# Altium PCB XMini.PcbDoc
Units mm, origin at the board's own origin, x right, y up, seen from the top; angles counter-clockwise.
Board outline 108.25 x 103.15 mm, 2 copper layers (Top Layer, Bottom Layer); 79 components, 103 nets, 273 pads, 164 vias.
Unrouted connection lines stored in the file: 2.
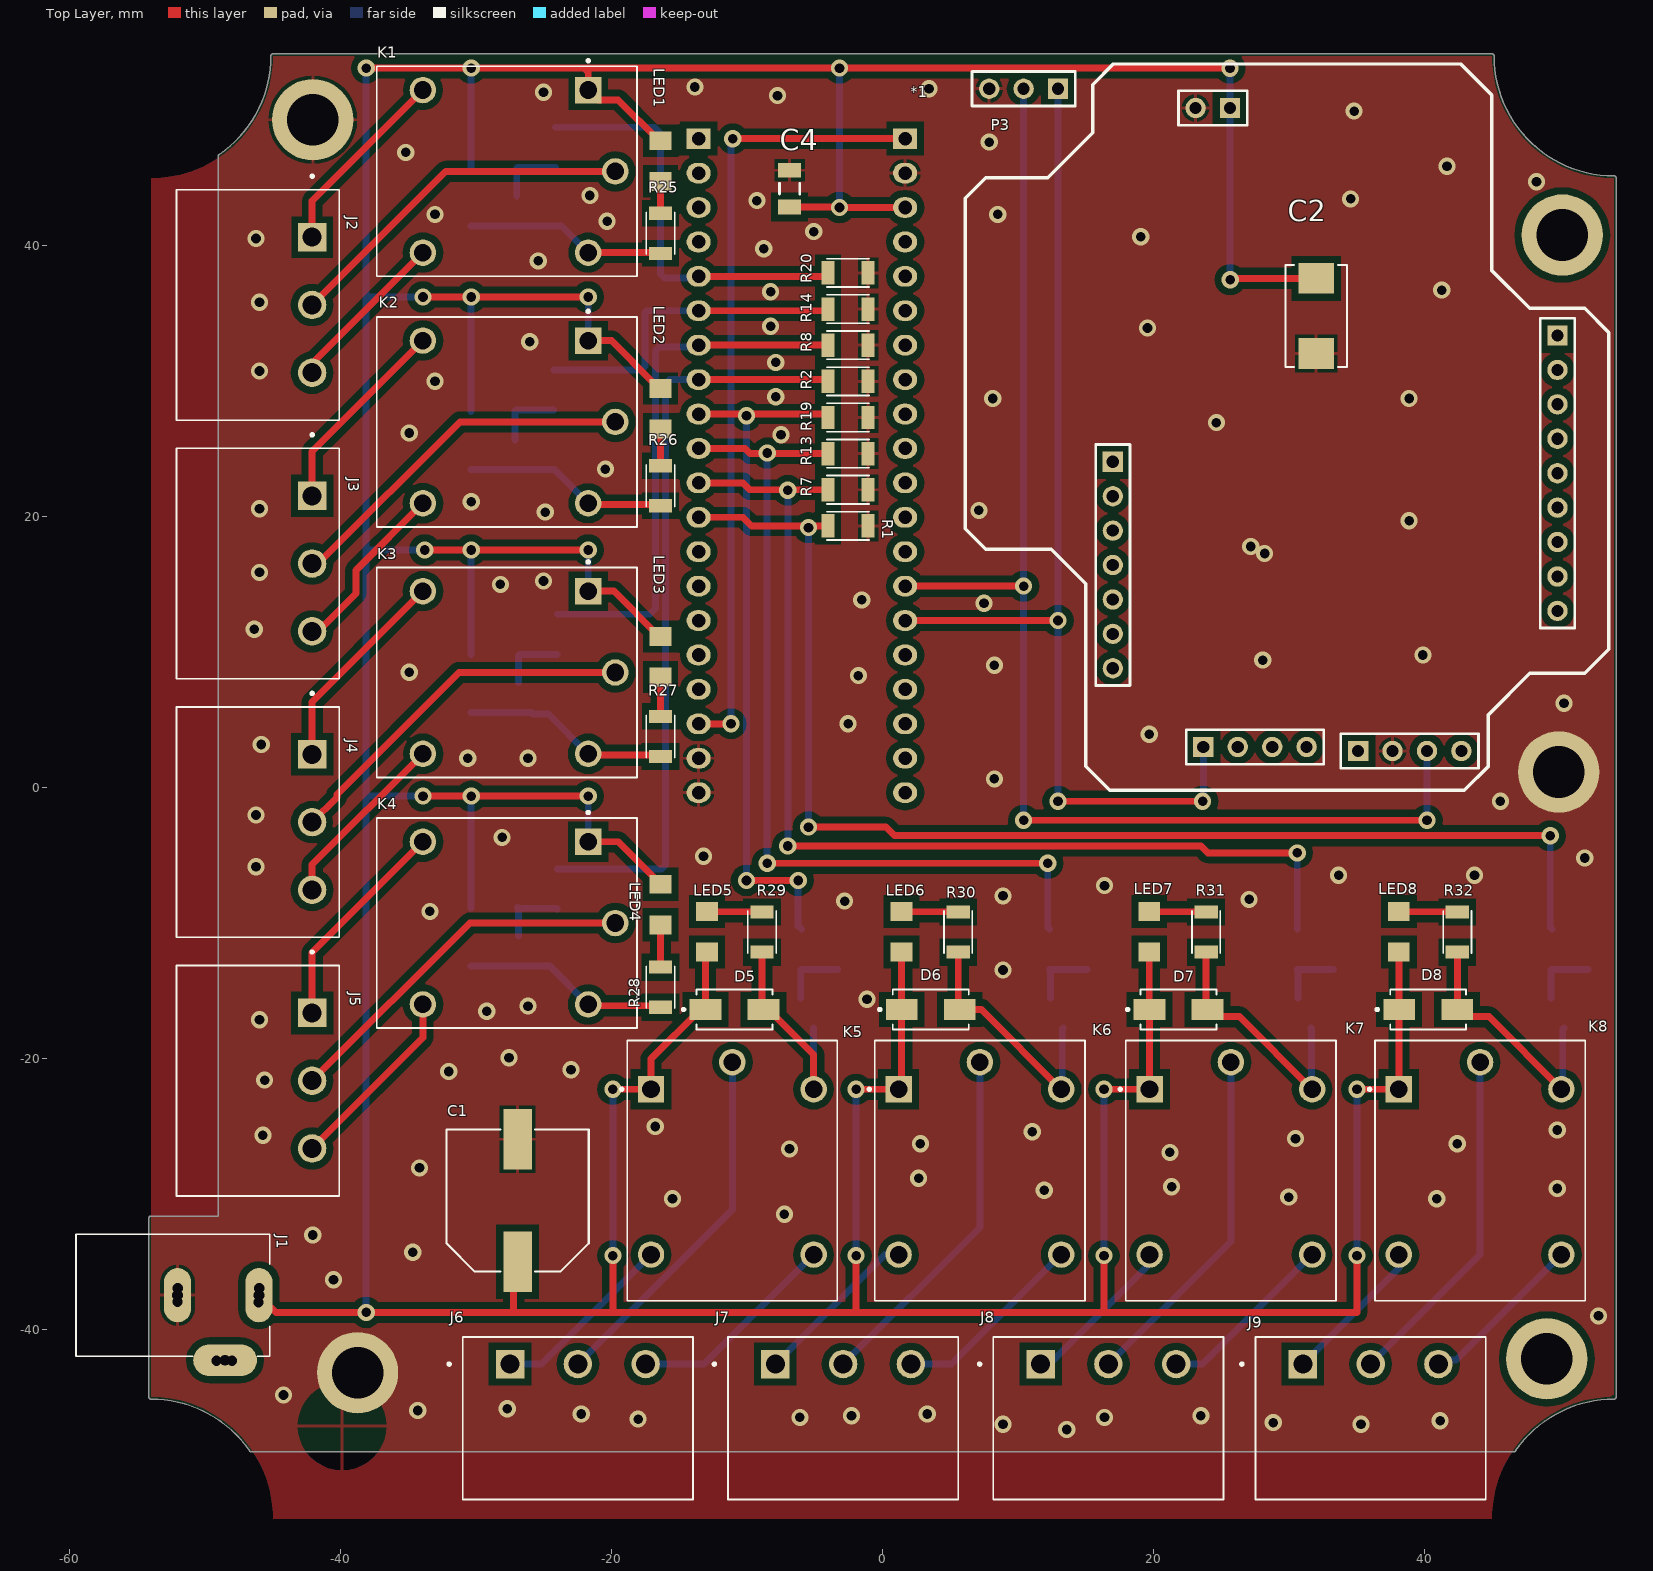
[diagram p0: Top Layer view]
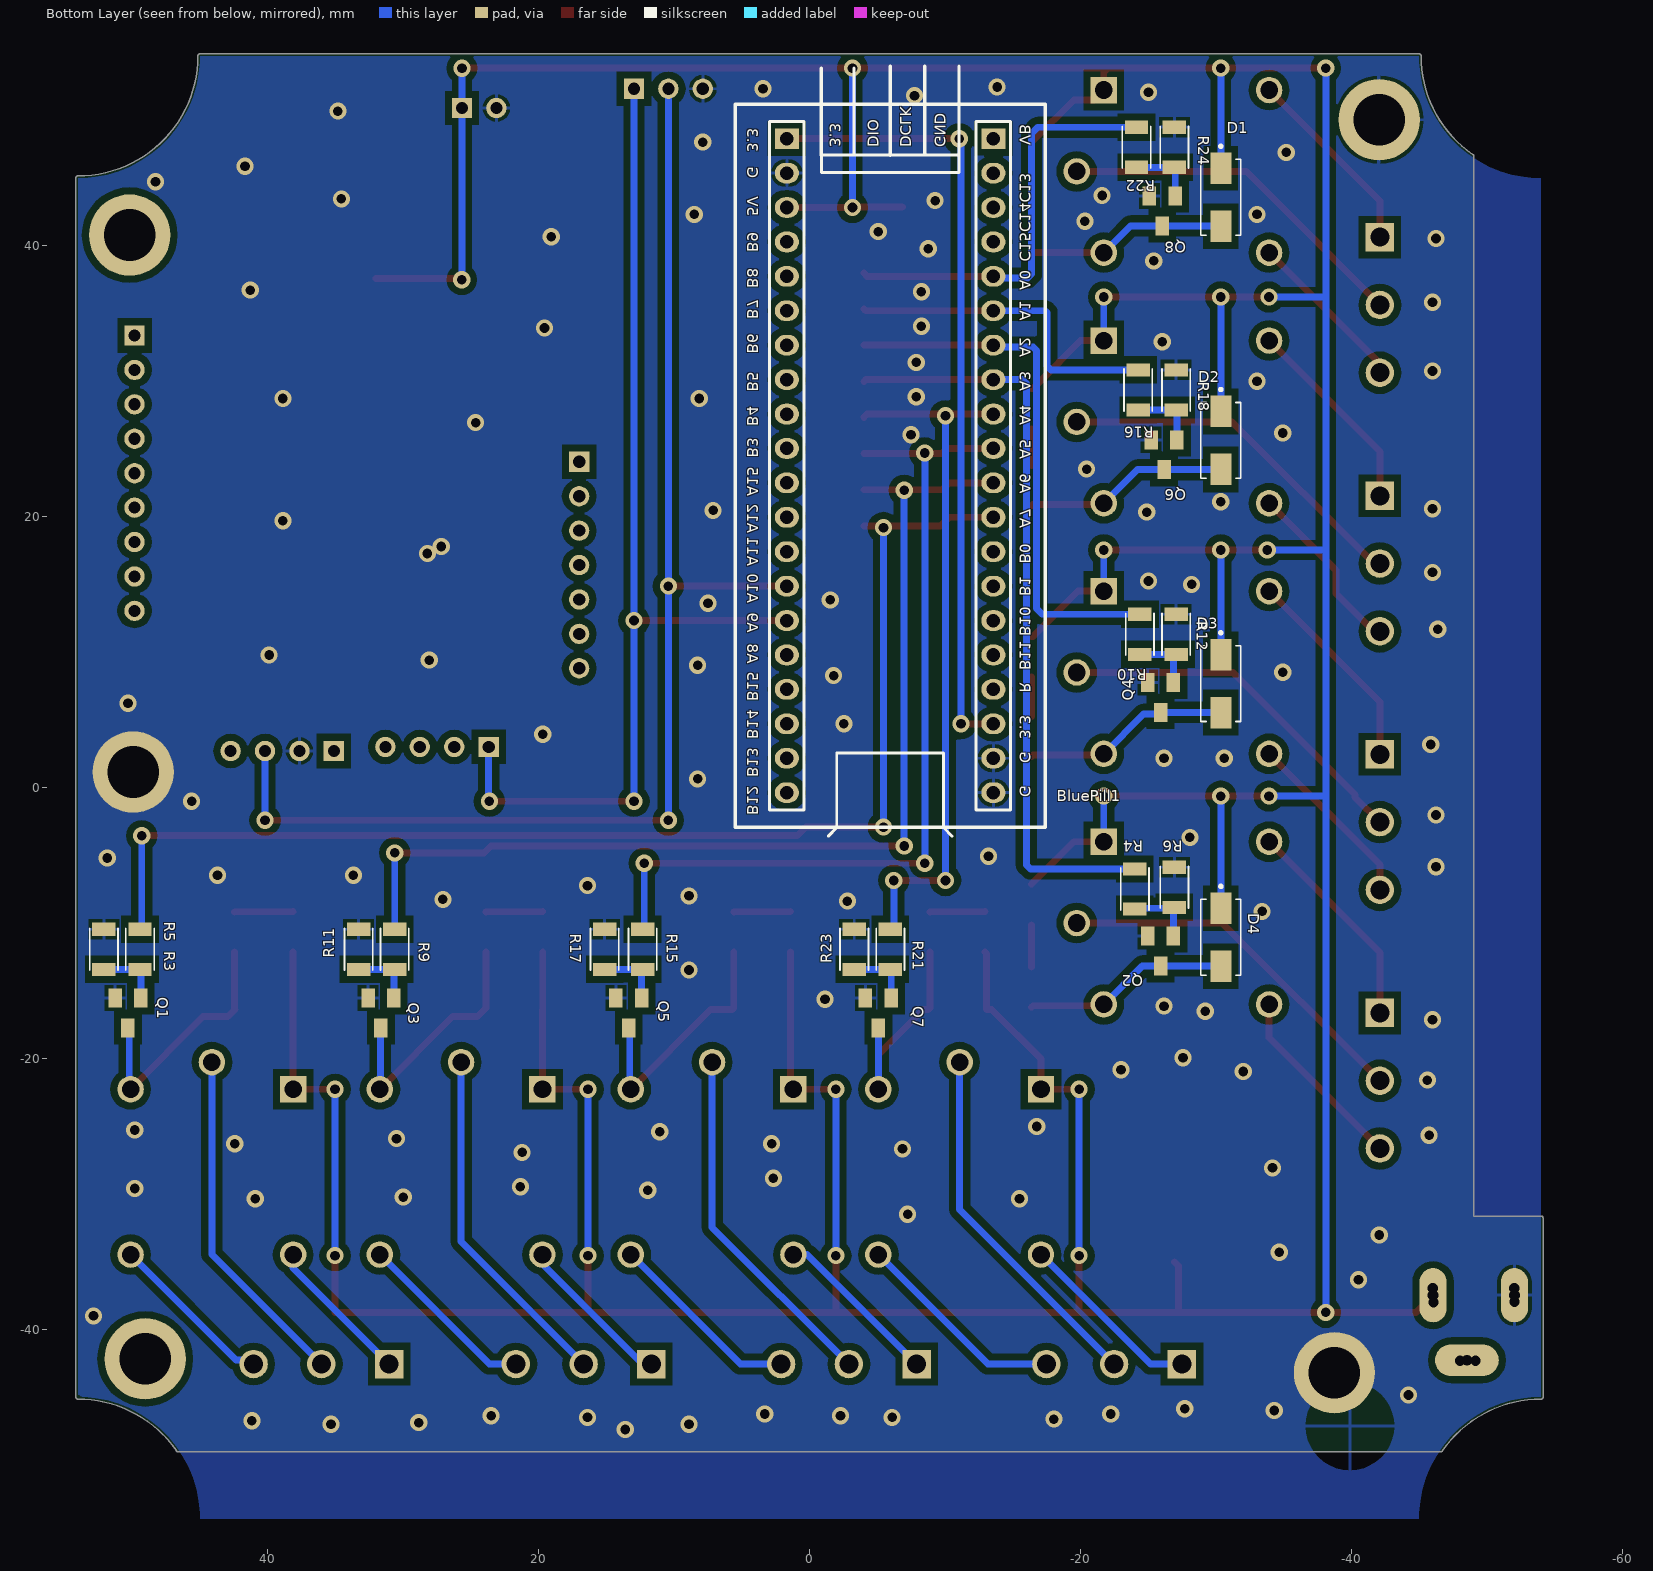
[diagram p1: Bottom Layer view, seen from below]

## Layer stack, top to bottom
Top Solder: solder mask 0.0102, Solder Resist, Dk 3.5
Top Layer: signal copper 0.0356
Dielectric 1: dielectric 0.32, FR-4, Dk 4.8
Bottom Layer: signal copper 0.0356
Bottom Solder: solder mask 0.0102, Solder Resist, Dk 3.5

## Board outline
-53.998,-45.127 cw(c-54,-45) -54.102,-45.076 cw(c-54,-45) -54.127,-44.999 -54.127,-31.75 cw(c-54,-31.75) -53.947,-31.634 cw(c-53.895,-31.75) -53.895,-31.623 -49.022,-31.623 -49.022,46.595 cw(c-48.895,46.595) -48.934,46.716 ccw(c-54,54) -45.127,53.998 cw(c-45,54) -45.076,54.102 cw(c-45,54) -44.999,54.127 44.999,54.127 cw(c45,54) 45.076,54.102 cw(c45,54) 45.127,54 cw(c45,54) 45.127,53.998 ccw(c54,54) 53.998,45.127 ccw(c54,54) 54,45.127 53.998,45.127 cw(c54,45) 54.102,45.076 cw(c54,45) 54.127,45 cw(c54,45) 54.127,44.999 54.127,-45 ccw(c54,-45) 54.127,-44.999 54.127,-45 cw(c54,-45) 54.102,-45.076 cw(c54,-45) 53.998,-45.127 cw(c54,-54) 54,-45.127 53.998,-45.127 ccw(c54,-54) 46.736,-48.905 cw(c46.609,-48.895) 46.609,-49.022 46.588,-49.022 -46.549,-49.022 cw(c-46.584,-48.9) -46.689,-48.972 ccw(c-54,-54)

## Design rules (kind name [scope] priority, off if disabled: settings)
Clearance [All] p1: gap=0.254 ignorepadtopadclearanceinfootprint=FALSE except(0: Arc-Hole Track-Hole SMDPad-Hole THPad-Hole Via-Hole Fill-Hole Poly-Hole Region-Hole Text-Hole; 0.508: Arc-Poly Track-Poly SMDPad-Poly THPad-Poly Via-Poly Fill-Poly Poly-Poly)
PolygonConnect [All] p1: connectstyle=Relief reliefconductorwidth=0.254 reliefentries=4 polygonreliefangle="90 Angle" airgapwidth=0.254
RoutingVias [All] p1: holewidth=0.711 width=1.27 viastyle="Through Hole" minholewidth=0.711 minwidth=1.27 maxholewidth=0.711 maxwidth=1.27
SolderMaskExpansion [All] p1: expansion=0.102
Width [All] p1: maxlimit=0.508 minlimit=0.508 preferedwidth=0.508
30 further rules are at their usual default settings.

## Components (designator, comment, footprint, x,y, rotation, side; value= is the part's Value field where it differs from the comment)
*1 "Component_1" Lora_Board 33.401,26.416 r0 top locked
BluePill1 "BluePill" "stm32 Blue pill" 5.352,-2.794 r180 bottom locked
C1 "1000uF" *CAPAE1030X1050N -26.924,-30.48 r90 top
C2 "100uF" *CAPCP7343X430N 32.004,34.798 r270 top
C4 "Cap Semi" C1206 -6.858,44.196 r270 top value=100nF
D1 "S1M" "SMD Diode*DIOM5227X270NSMD DiodeS1MSMD DiodePrimarySMD Diode" -30.353,43.561 r270 bottom
D2 "S1M" "SMD Diode*DIOM5227X270NSMD DiodeS1MSMD DiodePrimarySMD Diode" -30.353,25.612 r270 bottom
D3 "S1M" "SMD Diode*DIOM5227X270NSMD DiodeS1MSMD DiodePrimarySMD Diode" -30.353,7.662 r270 bottom
D4 "S1M" "SMD Diode*DIOM5227X270NSMD DiodeS1MSMD DiodePrimarySMD Diode" -30.353,-11.049 r270 bottom
D5 "S1M" "SMD Diode*DIOM5227X270NSMD DiodeS1MSMD DiodePrimarySMD Diode" -10.922,-16.383 r0 top
D6 "S1M" "SMD Diode*DIOM5227X270NSMD DiodeS1MSMD DiodePrimarySMD Diode" 3.556,-16.383 r0 top
D7 "S1M" "SMD Diode*DIOM5227X270NSMD DiodeS1MSMD DiodePrimarySMD Diode" 21.844,-16.383 r0 top
D8 "S1M" "SMD Diode*DIOM5227X270NSMD DiodeS1MSMD DiodePrimarySMD Diode" 40.259,-16.383 r0 top
J1 "DC-005" *NINIGI_DC-005 -48.514,-37.465 r0 top
J2 "1757488" *PHOENIX_1757488 -42.089,40.687 r270 top locked
J3 "1757488" *PHOENIX_1757488 -42.089,21.606 r270 top locked
J4 "1757488" *PHOENIX_1757488 -42.089,2.524 r270 top locked
J5 "1757488" *PHOENIX_1757488 -42.089,-16.557 r270 top locked
J6 "1757488" *PHOENIX_1757488 -27.559,-42.545 r0 top locked
J7 "1757488" *PHOENIX_1757488 -7.985,-42.545 r0 top locked
J8 "1757488" *PHOENIX_1757488 11.588,-42.545 r0 top locked
J9 "1757488" *PHOENIX_1757488 30.941,-42.545 r0 top locked
K1 "1-1721150-0" *TE_ORWH-SH-105D1F,000 -21.717,51.466 r180 top locked
K2 "1-1721150-0" *TE_ORWH-SH-105D1F,000 -21.717,32.977 r180 top locked
K3 "1-1721150-0" *TE_ORWH-SH-105D1F,000 -21.717,14.487 r180 top locked
K4 "1-1721150-0" *TE_ORWH-SH-105D1F,000 -21.717,-4.002 r180 top locked
K5 "1-1721150-0" *TE_ORWH-SH-105D1F,000 -17.08,-22.268 r270 top locked
K6 "1-1721150-0" *TE_ORWH-SH-105D1F,000 1.186,-22.268 r270 top locked
K7 "1-1721150-0" *TE_ORWH-SH-105D1F,000 19.707,-22.268 r270 top locked
K8 "1-1721150-0" *TE_ORWH-SH-105D1F,000 38.1,-22.268 r270 top locked
LED1 "Red" *LED_597-3111-407F -16.383,46.228 r90 top
LED2 "Red" *LED_597-3111-407F -16.383,27.94 r90 top
LED3 "Red" *LED_597-3111-407F -16.383,9.652 r90 top
LED4 "Red" *LED_597-3111-407F -16.383,-8.636 r90 top
LED5 "Red" *LED_597-3111-407F -12.954,-10.643 r270 top
LED6 "Red" *LED_597-3111-407F 1.397,-10.643 r270 top
LED7 "Red" *LED_597-3111-407F 19.685,-10.643 r270 top
LED8 "Red" *LED_597-3111-407F 38.1,-10.643 r270 top
P3 "Header 3" HDR1X3 12.954,51.562 r180 top
Q1 "2N7002" *SOT23 50.292,-16.637 r0 bottom
Q2 "2N7002" *SOT23 -25.908,-12.065 r0 bottom
Q3 "2N7002" *SOT23 31.623,-16.637 r0 bottom
Q4 "2N7002" *SOT23 -25.908,6.647 r0 bottom
Q5 "2N7002" *SOT23 13.335,-16.637 r0 bottom
Q6 "2N7002" *SOT23 -26.162,24.554 r0 bottom
Q7 "2N7002" *SOT23 -5.08,-16.637 r0 bottom
Q8 "2N7002" *SOT23 -26.035,42.545 r0 bottom
R1 "10K" *RESC3116X65N -2.54,19.304 r0 top
R2 "10K" *RESC3116X65N -2.54,29.972 r0 top
R3 "100" *RESC3116X65N 49.403,-11.938 r270 bottom
R4 "100" *RESC3116X65N -24.003,-7.493 r270 bottom
R5 "100K" *RESC3116X65N 52.07,-11.938 r90 bottom
R6 "100K" *RESC3116X65N -26.924,-7.366 r90 bottom
R7 "10K" *RESC3116X65N -2.54,21.971 r0 top
R8 "10K" *RESC3116X65N -2.54,32.639 r0 top
R9 "100" *RESC3116X65N 30.607,-11.938 r270 bottom
R10 "100" *RESC3116X65N -24.384,11.303 r270 bottom
R11 "100K" *RESC3116X65N 33.274,-11.938 r90 bottom
R12 "100K" *RESC3116X65N -27.051,11.303 r90 bottom
R13 "10K" *RESC3116X65N -2.54,24.638 r0 top
R14 "10K" *RESC3116X65N -2.54,35.306 r0 top
R15 "100" *RESC3116X65N 12.319,-11.938 r270 bottom
R16 "100" *RESC3116X65N -24.257,29.337 r270 bottom
R17 "100K" *RESC3116X65N 15.113,-11.938 r90 bottom
R18 "100K" *RESC3116X65N -27.051,29.337 r90 bottom
R19 "10K" *RESC3116X65N -2.54,27.305 r0 top
R20 "10K" *RESC3116X65N -2.54,37.973 r0 top
R21 "100" *RESC3116X65N -5.969,-11.938 r270 bottom
R22 "100" *RESC3116X65N -24.13,47.244 r270 bottom
R23 "100K" *RESC3116X65N -3.302,-11.938 r90 bottom
R24 "100K" *RESC3116X65N -26.924,47.244 r90 bottom
R25 "1K" *RESC3116X65N -16.383,40.894 r270 top
R26 "1K" *RESC3116X65N -16.383,22.267 r270 top
R27 "1K" *RESC3116X65N -16.383,3.768 r270 top
R28 "1K" *RESC3116X65N -16.383,-14.732 r270 top
R29 "1K" *RESC3116X65N -8.89,-10.668 r270 top
R30 "1K" *RESC3116X65N 5.588,-10.668 r270 top
R31 "1K" *RESC3116X65N 23.876,-10.668 r270 top
R32 "1K" *RESC3116X65N 42.418,-10.668 r270 top

## Footprints (in the part's own frame and the unit in brackets; to place one, negate y for a bottom-side part, rotate by r counter-clockwise, add the part's x,y. Pads: shape width x height; smd on the part's side, far side on the other; paste and mask are expansions set on the pad)
*CAPAE1030X1050N [mm]
  rect 4.46x2.12 smd: 1(-4.525,0) 2(4.525,0)
  silkscreen extent -5.25,-5.25 5.25,5.25
*CAPCP7343X430N [mil]
  rect 89x102 smd: 1(-109,0) 2(109,0)
  silkscreen extent -148,-89 148,89
*LED_597-3111-407F [mil]
  rect 55x63 smd: 1(-59,0) 2(59,0)
*NINIGI_DC-005 [mm]
  oval 4.7x2.35 hole 0.8: 2(0,-4.8)
  oval 2x4 hole 0.8: 3(-3.5,0) 4(2.5,0)
  silkscreen extent -11,-4.5 3.3,4.5
*PHOENIX_1757488 [mm]
  rect 2.1x2.1 hole 1.4: 1(0.08,0)
  round 2.1 hole 1.4: 2(5.08,0) 3(10.08,0)
  silkscreen extent -4.52,-10 13.58,2
*RESC3116X65N [mm]
  rect 0.97x1.73 smd: 1(-1.48,0) 2(1.48,0)
  silkscreen extent -1.55,-1.05 1.55,1.05
*SOT23 [mm]
  rect 1x1.4 smd: 1(-0.95,-1.1) 2(0.95,-1.1) 3(0,1.1)
*TE_ORWH-SH-105D1F,000 [mm]
  rect 1.95x1.95 hole 1.3: 1(0,0)
  round 1.95 hole 1.3: 2(0,12) 3(-2,6) 4(12.2,0) 5(12.2,12)
  silkscreen extent -3.6,-2.26 15.6,13.75
C1206 [mm] "Chip Capacitor, Body 3.2x1.6mm, IPC High Density"
  rect 1.1x1.7 smd: 1(-1.35,0) 2(1.35,0)
  silkscreen extent -0.4,-0.75 0.4,0.75, body extent -1.7,-0.9 1.7,0.9, height 1.3
HDR1X3 [mm] "Connector; Header; 3 Position"
  rect 1.5x1.5 hole 0.9: 1(0,0)
  round 1.5 hole 0.9: 2(2.54,0) 3(5.08,0)
  silkscreen extent -1.27,-1.27 6.35,1.27
Lora_Board [mm] "Parvizi Lora Board"
  rect 1.5x1.5 hole 0.9: E1(1.694,-23.722) PA0(-16.404,-2.382) PA3(-9.726,-23.422) PA8(16.404,6.938) VCC(-7.756,23.722)
  round 1.5 hole 0.9: GND(-10.296,23.722) GND(4.234,-23.722) MISO(16.404,-5.762) MOSI(16.404,-8.302) NSS(16.404,-0.682) PA9(16.404,4.398) PA10(16.404,1.858) PA15(-2.106,-23.422) PB3(-4.646,-23.422) PB4(-7.186,-23.422) PB5(-16.404,-17.622) PC13(-16.404,-4.922) SCK(16.404,-3.222) SCL(-16.404,-10.002) SDA(-16.404,-7.462) SWCLK(6.774,-23.722) SWDIO(9.314,-23.722) USART_CTS(16.404,-10.842) USART_RTS(16.404,-13.382) USART_RX(-16.404,-12.542) USART_TX(-16.404,-15.082)
  silkscreen extent -27.29,-26.62 20.2,26.97
"SMD Diode*DIOM5227X270NSMD DiodeS1MSMD DiodePrimarySMD Diode" [mm]
  rect 2.33x1.56 smd: A(2.14,0) C(-2.14,0)
  silkscreen extent -3.85,-1.47 2.8,1.47
"stm32 Blue pill" [mil] "BluePill"
  rect 70x60 hole 39.37: 1(745,1995) 40(145,1995)
  oval 70x60 hole 39.37: 2(745,1895) 3(745,1795) 4(745,1695) 5(745,1595) 6(745,1495) 7(745,1395) 8(745,1295) 9(745,1195) 10(745,1095) 11(745,995) 12(745,895) 13(745,795) 14(745,695) 15(745,595) 16(745,495) 17(745,395) 18(745,295) 19(745,195) 20(745,95) 21(145,95) 22(145,195) 23(145,295) 24(145,395) 25(145,495) 26(145,595) 27(145,695) 28(145,795) 29(145,895) 30(145,995) 31(145,1095) 32(145,1195) 33(145,1295) 34(145,1395) 35(145,1495) 36(145,1595) 37(145,1695) 38(145,1795) 39(145,1895)
  silkscreen extent -5,-32 895,2205

## Part data
BluePill1: library part Stm32BluePill, "Blue Pill Module"
C1: library part HZA107M050G24T-F, "Cap Aluminum Polymer Hybrid 100uF 50VDC 20% _10 X 10.2mm_ SMD 0.028 Ohm 2000mA 10000h 105C Automotive T/R", Package="Radial Cornell Dubilier", Availability=Unavailable, MF="Cornell Dubilier", MP=HZA107M050G24T-F, Price=None, SnapEDA_Link=https://www.snapeda.com/parts/HZA107M050G24T-F/Cornell%20Dubilier%20Electronics%20%28CDE%29/view-part/?ref=snap
C2: library part TAJE337K006R, "Capacitor tantalum TAJ 2717 330uF 6.3V", Package=None, Availability=Unavailable, MF=AVX, MP=TAJE337K006R, Price=None, SnapEDA_Link=https://www.snapeda.com/parts/TAJE337K006R/AVX/view-part/?ref=snap
C4: "Capacitor (Semiconductor SIM Model)", LatestRevisionDate=29-May-2009, LatestRevisionNote="IPC-7351 Footprint Added.", PackageDescription="Chip Capacitor", PackageReference=C1206, Published=8-Jun-2000, Publisher="Altium Limited"
D1 D2 D3 D4 D5 D6 D7 D8: "S1 Series 1000 V 1 A 1 uA Surface Mount General Purpose Rectifier - DO-214AC", Package="DO-214AC-214 ON Semiconductor", Availability=Unavailable, MF="ON Semiconductor", MP=S1M, Price=None, SnapEDA_Link=https://www.snapeda.com/parts/S1M/ON%20Semiconductor/view-part/?ref=snap
J1: Package="0603 Ninigi", Availability=Unavailable, MF="Littelfuse Inc.", MP=DC-005, Price=None, SnapEDA_Link=https://www.snapeda.com/parts/DC-005/Littelfuse%20Inc./view-part/?ref=snap
J2 J3 J4 J5 J6 J7 J8 J9: "Conn; TermBlk; PCB; Header; SnglLvl; 90DegAngl; Sldr; 3Pole; 5mmPitch; COMBICON", Package=None, Availability=Unavailable, MF="Phoenix Contact", MP=1757488, Price=None, SnapEDA_Link=https://www.snapeda.com/parts/1757488/Phoenix%20Contact/view-part/?ref=snap
K1 K2 K3 K4 K5 K6 K7 K8: library part ORWH-SH-105D1F,000, "General Purpose Relay, ORWH Series, Power, Non Latching, SPDT, 5 VDC, 10 A", Package=None, Availability=Unavailable, MF="TE Connectivity", MP=ORWH-SH-105D1F,000, Price=None, SnapEDA_Link=https://www.snapeda.com/parts/ORWH-SH-105D1F%2C000/TE%20Connectivity%20Potter%20%26%20Brumfield%20Relays/view-part/?ref=snap, TE_purchase_URL=https://www.te.com/usa-en/product-1-1721150-0.html?te_bu=Cor&te_type=disp&te_campaign=seda_glo_cor-seda-global-disp-prtnr-fy19-seda-model-bom-cta_sma-317_1&elqCampaignId=32493
LED1 LED2 LED3 LED4 LED5 LED6 LED7 LED8: library part 597-3111-407F, "LED RED CLEAR 1206 SMD", Package="1206 Dialight", Availability=Unavailable, MF=Dialight, MP=5973111407F, Price=None, SnapEDA_Link=https://www.snapeda.com/parts/5973111407F/Dialight/view-part/?ref=snap
P3: "Header, 3-Pin", LatestRevisionDate=17-Jul-2002, LatestRevisionNote="Re-released for DXP Platform.", Publisher="Altium Limited"
Q1 Q2 Q3 Q4 Q5 Q6 Q7 Q8: "Transistor NPN Mos 2N7002 SILICONIX miliampere=100 V=60 SOt23", Package="SOT-23-3 Vishay", Availability=Unavailable, MF=STMicroelectronics, MP=2N7002, Price=None, SnapEDA_Link=https://www.snapeda.com/parts/2N7002/STMicroelectronics/view-part/?ref=snap
R1 R2 R3 R4 R5 R6 R7 R8 R9 R10 R11 R12 R13 R14 R15 R16 R17 R18 R19 R20 R21 R22 R23 R24 R25 R26 R27 R28 R29 R30 R31 R32: library part RT1206DRE07120KL, "Res Smd 120k Ohm 0.5% 1/8w 1206", Package="1206 Yageo", Availability=Unavailable, MF=Yageo, MP=RT1206DRE07120KL, Price=None, SnapEDA_Link=https://www.snapeda.com/parts/RT1206DRE07120KL/Yageo/view-part/?ref=snap

## Free pads (board coordinates)
  round 1.524 hole 0.762: 4(-48.006,-42.291) 4(-46.04,-37.973) 4(-45.988,-36.957) 5(-49.149,-42.291) 6(-52.019,-37.948) 7(-51.994,-36.957)
  round 6 hole 3.81: 5(-42.037,49.276) 5(-38.735,-43.18) 5(49.022,-42.164) 5(49.911,1.143) 5(50.165,40.767)

## Via types
v1: diameter 1.27, hole 0.711, Top Layer to Bottom Layer, tented both sides, 164 vias

## Nets (pads, with @x,y where several pads share a name; then routed paths per layer and width w, separated by ;. In a path a pad name is that pad's centre, name@x,y a point inside that pad or via, vN(x,y) a via of type N, cw(c..) or ccw(c..) an arc to the next point about the centre after c; other vN are vias at no path point)
3.3V: BluePill1.18 BluePill1.40 | length 58.3
  Top Layer w0.508: BluePill1.18 v1(-11.176,4.699) ; v1(-11.049,47.879) BluePill1.40
  Bottom Layer w0.508: v1(-11.176,4.699) -11.176,47.752 v1(-11.049,47.879)
5V: *1.VCC BluePill1.38 C1.1 C2.1 C4.2 D1.C D2.C D3.C D4.C D5.C D6.C D7.C D8.C J1.4 K1.1 K2.1 K3.1 K4.1 K5.1 K6.1 K7.1 K8.1 LED1.2 LED2.2 LED3.2 LED4.2 LED5.2 LED6.2 LED7.2 LED8.2 pad.4@-45.988,-36.957 pad.4@-46.04,-37.973 | length 522.7
  Top Layer w0.508: J1.4 -44.744,-38.735 v1(-38.1,-38.735) -27.222,-38.735 ; v1(-38.1,53.086) v1(-30.353,53.086) -22.015,53.086 ; v1(-33.909,-0.635) v1(-30.353,-0.635) v1(-21.717,-0.635) ; v1(-33.909,36.195) v1(-30.353,36.195) v1(-21.717,36.195) ; v1(-33.782,17.526) v1(-30.353,17.526) v1(-21.717,17.526) ; C1.1 -27.222,-35.303 -27.222,-38.735 ; K4.1 -19.518,-4.002 LED4.2 ; K3.1 -19.821,14.487 -16.485,11.151 LED3.2 ; K2.1 -19.98,32.977 -18.455,31.451 -18.455,31.409 -16.485,29.439 LED2.2 ; v1(-19.896,-34.544) -19.896,-38.692 -19.939,-38.735 ; v1(-19.896,-22.268) K5.1 -17.08,-20.016 -13.447,-16.383 D5.C -13.062,-12.249 LED5.2 ; LED1.2 -16.485,47.727 -19.503,50.745 -20.996,50.745 K1.1 -21.717,52.788 -22.015,53.086 ; C4.2 -6.834,42.823 -3.199,42.823 v1(-3.175,42.799) BluePill1.38 ; v1(-1.948,-34.544) -1.948,-38.651 -2.032,-38.735 ; v1(-1.948,-22.268) K6.1 1.416,-22.038 D6.C 1.416,-12.16 LED6.2 ; v1(16.34,-34.544) 16.34,-38.651 16.256,-38.735 ; v1(16.34,-22.268) K7.1 19.704,-22.265 D7.C 19.685,-16.364 LED7.2 ; v1@25.781,37.592 25.806,37.567 C2.1 ; v1@25.781,52.959 25.654,53.086 v1(-3.175,53.086) -22.015,53.086 ; v1(35.009,-34.544) 35.009,-38.735 16.256,-38.735 ; v1(35.009,-22.268) K8.1 38.119,-22.249 D8.C 38.119,-12.16 LED8.2 ; -27.222,-38.735 -19.939,-38.735 ; -19.939,-38.735 -2.032,-38.735 ; -2.032,-38.735 16.256,-38.735
  Bottom Layer w0.508: v1(-38.1,-38.735) -38.1,-0.762 ; v1(-38.1,53.086) -38.1,36.195 ; v1(-33.909,-0.635) -37.973,-0.635 -38.1,-0.762 ; v1(-33.909,36.195) -38.1,36.195 ; v1(-33.782,17.526) -38.1,17.526 ; D4.C v1(-30.353,-0.635) ; D3.C v1(-30.353,17.526) ; D2.C v1(-30.353,36.195) ; D1.C v1(-30.353,53.086) ; K4.1 v1(-21.717,-0.635) ; K3.1 v1(-21.717,17.526) ; K2.1 v1(-21.717,36.195) ; v1@-19.896,-34.925 v1(-19.896,-34.544) v1(-19.896,-22.268) ; v1(-3.175,42.799) v1(-3.175,53.086) ; v1(-1.948,-34.544) v1(-1.948,-22.268) ; v1(16.34,-34.544) v1(16.34,-22.268) ; v1(25.654,37.465) 25.645,37.474 *1.VCC v1(25.645,53.077) v1@25.654,53.086 ; v1@35.009,-34.671 v1(35.009,-34.544) v1(35.009,-22.268) ; -38.1,-0.762 -38.1,17.526 ; -38.1,17.526 -38.1,36.195
GND: *1.GND BluePill1.19 BluePill1.20 BluePill1.39 C1.2 C2.2 C4.1 J1.3 P3.3 pad.5@49.022,-42.164 pad.5@49.911,1.143 pad.5@50.165,40.767 pad.5@-38.735,-43.18 pad.5@-42.037,49.276 pad.6 pad.7 Q1.2 Q2.2 Q3.2 Q4.2 Q5.2 Q6.2 Q7.2 Q8.2 R1.2 R2.2 R5.2 R6.2 R7.2 R8.2 R11.2 R12.2 R13.2 R14.2 R17.2 R18.2 R19.2 R20.2 R23.2 R24.2
  other v1: 13.589,-47.371 8.89,-46.99 35.306,-46.99 28.829,-46.863 41.148,-46.736 -18.034,-46.609 -6.096,-46.482 16.383,-46.482 -2.286,-46.355 23.495,-46.355 -22.225,-46.228 3.302,-46.228 -34.29,-45.974 -27.686,-45.847 -44.196,-44.831 52.832,-38.989 -40.513,-36.322 -34.671,-34.29 -42.037,-33.02 -7.239,-31.496 -15.494,-30.353 40.894,-30.353 29.972,-30.226 11.938,-29.718 49.784,-29.591 21.336,-29.464 2.667,-28.829 -34.163,-28.067 21.209,-26.924 -6.858,-26.67 2.794,-26.289 42.418,-26.289 30.48,-25.908 -45.72,-25.654 11.049,-25.4 49.784,-25.273 -16.764,-25.019 -45.593,-21.59 -32.004,-20.955 -22.987,-20.828 -27.559,-19.939 -45.974,-17.145 -29.21,-16.51 -26.162,-16.129 -1.143,-15.621 8.89,-13.462 -33.401,-9.144 -2.794,-8.382 27.051,-8.255 8.89,-8.001 16.383,-7.239 33.655,-6.477 43.688,-6.477 -46.228,-5.842 51.816,-5.207 -13.208,-5.08 -28.067,-3.683 -46.228,-2.032 45.593,-1.016 8.255,0.635 -30.607,2.159 -26.162,2.159 -45.847,3.175 19.685,3.937 -2.54,4.699 50.292,6.223 -1.778,8.255 -34.925,8.509 8.255,9.017 28.067,9.398 39.878,9.779 -46.355,11.684 7.493,13.589 -1.524,13.843 -28.194,14.986 -25.019,15.24 -45.974,15.875 28.194,17.272 27.178,17.78 38.862,19.685 -24.892,20.32 7.112,20.447 -45.974,20.574 -30.353,21.082 -20.447,23.495 -7.493,26.035 -34.925,26.162 24.638,26.924 8.128,28.702 38.862,28.702 -7.874,28.829 -33.02,29.972 -45.974,30.734 -7.874,31.369 -26.035,32.893 19.558,33.909 -8.255,34.036 -45.974,35.814 -8.255,36.576 41.275,36.703 -25.4,38.862 -8.763,39.751 -46.228,40.513 19.05,40.64 -5.08,41.021 -20.32,41.783 -33.02,42.291 8.509,42.291 -9.271,43.307 34.544,43.434 -21.59,43.688 48.26,44.704 41.656,45.847 -35.179,46.863 7.874,47.625 34.798,49.911 -7.747,51.054 -25.019,51.308 3.429,51.562 -13.843,51.689
LPA0: *1.PA0
LPA3: *1.PA3 BluePill1.26 P3.1 | length 78.4
  Top Layer w0.508: BluePill1.26 v1@12.827,12.319 ; v1(12.954,-1.016) v1(23.622,-1.016)
  Bottom Layer w0.508: v1(12.954,-1.016) v1(12.954,12.319) P3.1 ; v1(23.622,-1.016) 23.675,-0.963 *1.PA3
LPA8: *1.PA8
LPA9: *1.PA9
LPA10: *1.PA10
LPA15: *1.PA15
LPB3: *1.PB3
LPB4: *1.PB4
LPB5: *1.PB5
LPC13: *1.PC13
MISO: *1.MISO
MOSI: *1.MOSI
NC: 
NetJ2_1: J2.1 K1.4 | length 14.2
  Top Layer w0.508: J2.1 -42.089,43.294 K1.4
NetJ2_2: J2.2 K1.3 | length 26.5
  Top Layer w0.508: J2.2 -32.23,45.466 K1.3
NetJ2_3: J2.3 K1.5 | length 12.2
  Top Layer w0.508: J2.3 -42.089,31.294 K1.5
NetJ3_1: J3.1 K2.4 | length 14.8
  Top Layer w0.508: J3.1 -42.089,24.804 K2.4
NetJ3_2: J3.2 K2.3 | length 26.7
  Top Layer w0.508: J3.2 -41.64,16.526 -31.189,26.977 K2.3
NetJ3_3: J3.3 K2.5 | length 13.1
  Top Layer w0.508: J3.3 -41.658,11.526 -38.862,14.322 -38.862,16.032 K2.5
NetJ4_1: J4.1 K3.4 | length 15.4
  Top Layer w0.508: J4.1 -42.089,6.315 K3.4
NetJ4_2: J4.2 K3.3 | length 27.1
  Top Layer w0.508: J4.2 -40.259,-0.725 -40.259,-0.508 -31.264,8.487 K3.3
NetJ4_3: J4.3 K3.5 | length 13.4
  Top Layer w0.508: J4.3 -42.089,-5.685 K3.5
NetJ5_1: J5.1 K4.4 | length 16
  Top Layer w0.508: J5.1 -42.089,-12.174 K4.4
NetJ5_2: J5.2 K4.3 | length 27.2
  Top Layer w0.508: J5.2 -30.454,-10.002 K4.3
NetJ5_3: J5.3 K4.5 | length 14
  Top Layer w0.508: J5.3 -33.917,-18.465 K4.5
NetJ6_1: J6.1 K5.4 | length 13.7
  Bottom Layer w0.508: J6.1 -25.157,-42.545 K5.4
NetJ6_2: J6.2 K5.3 | length 27
  Bottom Layer w0.508: J6.2 -11.08,-31.146 K5.3
NetJ6_3: J6.3 K5.5 | length 15.7
  Bottom Layer w0.508: J6.3 -13.157,-42.545 K5.5
NetJ7_1: J7.1 K6.4 | length 12.4
  Bottom Layer w0.508: J7.1 0.172,-34.468 K6.4
NetJ7_2: J7.2 K6.3 | length 26.5
  Bottom Layer w0.508: J7.2 7.186,-32.453 K6.3
NetJ7_3: J7.3 K6.5 | length 14.4
  Bottom Layer w0.508: J7.3 5.109,-42.545 K6.5
NetJ8_1: J8.1 K7.4 | length 11.9
  Bottom Layer w0.508: J8.1 11.795,-42.672 12.192,-42.672 19.707,-35.157 K7.4
NetJ8_2: J8.2 K7.3 | length 26
  Bottom Layer w0.508: J8.2 25.707,-33.507 K7.3
NetJ8_3: J8.3 K7.5 | length 13.4
  Bottom Layer w0.508: J8.3 23.629,-42.545 K7.5
NetJ9_1: J9.1 K8.4 | length 11
  Bottom Layer w0.508: J9.1 38.1,-35.466 K8.4
NetJ9_2: J9.2 K8.3 | length 25.6
  Bottom Layer w0.508: J9.2 44.1,-34.466 K8.3
NetJ9_3: J9.3 K8.5 | length 12.4
  Bottom Layer w0.508: J9.3 41.326,-42.24 42.327,-42.24 K8.5
NetLED1_1: LED1.1 R25.1 | length 2.4
  Top Layer w0.508: R25.1 LED1.1
NetLED2_1: LED2.1 R26.1 | length 2.7
  Top Layer w0.508: R26.1 LED2.1
NetLED3_1: LED3.1 R27.1 | length 2.9
  Top Layer w0.508: R27.1 LED3.1
NetLED4_1: LED4.1 R28.1 | length 3.1
  Top Layer w0.508: R28.1 LED4.1
NetLED5_1: LED5.1 R29.1 | length 4.1
  Top Layer w0.508: LED5.1 -12.932,-9.166 -8.912,-9.166 R29.1
NetLED6_1: LED6.1 R30.1 | length 4.2
  Top Layer w0.508: LED6.1 1.419,-9.166 5.566,-9.166 R30.1
NetLED7_1: LED7.1 R31.1 | length 4.2
  Top Layer w0.508: LED7.1 19.707,-9.166 23.854,-9.166 R31.1
NetLED8_1: LED8.1 R32.1 | length 4.3
  Top Layer w0.508: LED8.1 38.122,-9.166 42.396,-9.166 R32.1
NetQ1_1: Q1.1 R3.2 R5.1 | length 4.8
  Bottom Layer w0.508: Q1.1 49.342,-13.479 R3.2 R5.1
NetQ2_1: Q2.1 R4.2 R6.1 | length 5
  Bottom Layer w0.508: R6.1 R6.1@-26.86,-8.91 ; Q2.1 -26.858,-8.912 R6.1@-26.86,-8.91 ; R4.2 -24.066,-8.91 R6.1@-26.86,-8.91
NetQ3_1: Q3.1 R9.2 R11.1 | length 4.8
  Bottom Layer w0.508: Q3.1 30.673,-13.484 R9.2 R11.1
NetQ4_1: Q4.1 R10.2 R12.1 | length 4.9
  Bottom Layer w0.508: Q4.1 -26.858,9.762 -26.797,9.823 R10.2 R10.2@-24.003,9.823
NetQ5_1: Q5.1 R15.2 R17.1 | length 4.9
  Bottom Layer w0.508: Q5.1 12.385,-13.484 R15.2 R17.1
NetQ6_1: Q6.1 R16.2 R18.1 | length 5
  Bottom Layer w0.508: Q6.1 -27.112,27.796 R18.1 R16.2
NetQ7_1: Q7.1 R21.2 R23.1 | length 4.8
  Bottom Layer w0.508: Q7.1 -6.03,-13.479 R21.2 R23.1
NetQ8_1: Q8.1 R22.2 R24.1 | length 4.9
  Bottom Layer w0.508: Q8.1 -26.985,45.703 R24.1 R22.2
NSS: *1.NSS
PA0: BluePill1.5 R20.1 R22.1 | length 31
  Top Layer w0.508: BluePill1.5 -4.251,37.719 -4.02,37.95 R20.1
  Bottom Layer w0.508: R22.1 -16.847,48.724 -16.383,48.26 -16.383,37.89 -16.085,37.592 -13.698,37.592 BluePill1.5
PA1: BluePill1.6 R14.1 R16.1 | length 24.4
  Top Layer w0.508: BluePill1.6 -4.147,35.179 R14.1
  Bottom Layer w0.508: R16.1 -17.824,30.817 -17.526,31.115 -17.526,35.052 -17.399,35.179 BluePill1.6
PA2: BluePill1.7 R8.1 R10.1 | length 39.4
  Top Layer w0.508: BluePill1.7 R8.1
  Bottom Layer w0.508: R10.1@-24.003,12.783 -17.189,12.783 -16.764,13.208 -16.764,32.258 -16.51,32.512 -13.698,32.512 BluePill1.7
PA3: BluePill1.8 R2.1 R4.1 | length 55.8
  Top Layer w0.508: BluePill1.8 -4.147,30.099 R2.1
  Bottom Layer w0.508: R4.1 -16.3,-6.013 -16.002,-5.715 -16.002,29.801 -15.704,30.099 BluePill1.8
PA4: BluePill1.9 R19.1 R21.1 | length 51.5
  Top Layer w0.508: BluePill1.9 -4.251,27.559 -4.02,27.328 R19.1 ; v1(-10.033,-6.858) v1(-6.223,-6.858)
  Bottom Layer w0.508: v1(-10.033,-6.858) v1(-10.033,27.432) ; v1(-6.223,-6.858) -6.223,-10.227 -5.992,-10.458 R21.1
PA5: BluePill1.10 R13.1 R15.1 | length 65.8
  Top Layer w0.508: BluePill1.10 -10.16,25.019 -9.779,24.638 R13.1 ; v1(-8.509,-5.588) v1(12.192,-5.588)
  Bottom Layer w0.508: v1@-8.763,24.511 v1@-8.636,24.384 ; v1(-8.509,-5.588) v1(-8.509,24.68) ; v1(12.192,-5.588) 12.192,-10.331 R15.1
PA6: BluePill1.11 R7.1 R9.1 | length 79.4
  Top Layer w0.508: BluePill1.11 -10.287,22.479 -9.779,21.971 R7.1 ; v1(-6.985,-4.318) 23.495,-4.318 24.003,-4.826 v1(30.607,-4.826)
  Bottom Layer w0.508: v1(-6.985,-4.318) v1(-6.985,21.929) ; R9.1 v1(30.607,-4.826)
PA7: BluePill1.12 R1.1 R3.1 | length 93.9
  Top Layer w0.508: BluePill1.12 -10.287,19.939 -9.652,19.304 R1.1 ; v1(-5.461,-2.921) 0.254,-2.921 0.889,-3.556 v1(49.276,-3.556)
  Bottom Layer w0.508: v1(-5.461,-2.921) v1(-5.461,19.177) ; v1(49.276,-3.556) 49.276,-10.331 R3.1
PA8: BluePill1.25
PA11: BluePill1.28
PA12: BluePill1.29
PA15: BluePill1.30
PB0: BluePill1.13
PB1: BluePill1.14
PB3: BluePill1.31
PB4: BluePill1.32
PB5: BluePill1.33
PB6: BluePill1.34
PB7: BluePill1.35
PB8: BluePill1.36
PB9: BluePill1.37
PB10: BluePill1.15
PB11: BluePill1.16
PB12: BluePill1.21
PB13: BluePill1.22
PB14: BluePill1.23
PB15: BluePill1.24
"Relay 1": D1.A K1.2 Q8.3 R25.2 | length 14.8
  Top Layer w0.508: K1.2 -16.435,39.466 R25.2
  Bottom Layer w0.508: D1.A -30.329,41.445 Q8.3 -23.696,41.445 K1.2
"Relay 2": D2.A K2.2 Q6.3 R26.2 | length 15.1
  Top Layer w0.508: K2.2 -21.622,20.882 -16.478,20.882 R26.2
  Bottom Layer w0.508: D2.A -30.335,23.454 Q6.3 -24.194,23.454 K2.2
"Relay 3": D3.A K3.2 Q4.3 R27.2 | length 15.3
  Top Layer w0.508: K3.2 -21.617,2.387 -16.483,2.387 R27.2
  Bottom Layer w0.508: D3.A -30.328,5.547 Q4.3 -25.777,5.416 -24.646,5.416 K3.2
"Relay 4": D4.A K4.2 Q2.3 R28.2 | length 15.2
  Top Layer w0.508: K4.2 -21.612,-16.107 -16.488,-16.107 R28.2
  Bottom Layer w0.508: D4.A -30.329,-13.165 Q2.3 -24.554,-13.165 K4.2
"Relay 5": D5.A K5.2 Q7.3 R29.2 | length 16.5
  Top Layer w0.508: R29.2 -8.89,-16.275 D5.A -8.397,-16.383 -5.08,-19.7 K5.2
  Bottom Layer w0.508: K5.2 Q7.3
"Relay 6": D6.A K6.2 Q5.3 R30.2 | length 18.8
  Top Layer w0.508: R30.2 5.588,-16.275 D6.A 7.302,-16.383 K6.2
  Bottom Layer w0.508: K6.2 13.261,-22.193 13.261,-17.811 Q5.3
"Relay 7": D7.A K7.2 Q3.3 R31.2 | length 19
  Top Layer w0.508: R31.2 23.876,-16.275 D7.A 24.51,-16.909 26.348,-16.909 K7.2
  Bottom Layer w0.508: Q3.3 31.665,-17.779 31.665,-22.226 K7.2
"Relay 8": D8.A K8.2 Q1.3 R32.2 | length 19
  Top Layer w0.508: R32.2 42.418,-16.364 D8.A 42.925,-16.909 44.741,-16.909 K8.2
  Bottom Layer w0.508: K8.2 50.196,-22.172 50.196,-17.833 Q1.3
Reset: BluePill1.17
RX1: *1.SWCLK BluePill1.27 P3.2 | length 97.5
  Top Layer w0.508: BluePill1.27 v1(10.414,14.859) ; v1(10.414,-2.413) v1@40.132,-2.413
  Bottom Layer w0.508: v1(10.414,-2.413) v1(10.414,14.859) P3.2 ; v1(40.175,-2.413) *1.SWCLK
SCK: *1.SCK
SCL: *1.SCL
SDA: *1.SDA
SWDIO: *1.SWDIO
USART_CTS: *1.USART_CTS
USART_RTS: *1.USART_RTS
USART_RX: *1.USART_RX
USART_TX: *1.USART_TX
VB: BluePill1.1
pads on no net: *1.E1 BluePill1.2 BluePill1.3 BluePill1.4 J1.2

## Polygon pours and split planes (outlines as drawn)
GND on Bottom Layer "GND_L02_P004" (solid, pour order 4): -44.958,53.975 44.958,53.975 ccw(c53.975,53.975) 53.975,44.958 53.975,-44.958 cw(c53.975,-44.831) 53.975,-44.958 ccw(c53.975,-53.975) 44.958,-53.975 -44.958,-53.975 ccw(c-53.975,-53.975) -53.975,-44.958 -53.975,44.958 ccw(c-53.975,53.975)
GND on Bottom Layer "GND_L02_P000" (solid, pour order 0): -44.958,53.975
GND on Top Layer "GND_L01_P002" (solid, pour order 2): -44.958,53.975 44.958,53.975 ccw(c53.975,53.975) 53.975,44.958 53.975,-44.958 cw(c53.975,-44.831) 53.975,-44.958 ccw(c53.975,-53.975) 44.958,-53.975 -44.958,-53.975 ccw(c-53.975,-53.975) -53.975,-44.958 -53.975,44.958 ccw(c-53.975,53.975)

## Silkscreen, mask and mechanical layers (free items; w line width, h text height)
Mechanical 1:
  region: 2.286,9.017
  region: -45,54
  region: -54.356,53.594
  region: -51.816,53.721
  lines w0.254: -54,-31.75 -54,-45 cw(c-54,-54) -46.584,-48.9 ; -53.895,-31.75 -48.895,-31.75 -48.895,46.595 ; -48.885,46.595 ccw(c-54,54) -45,54 45,54 ccw(c54,54) 54,45 54,-45 ccw(c54,-54) 46.588,-48.895 ; -46.577,-48.895 46.609,-48.895

## Text inside footprints (layer, text, board x,y; h text height)
BluePill1: Bottom Overlay "C15C14C13" at -15.527,38.786 h0.8 r90; Bottom Overlay "G" at -15.527,-0.737 h0.8 r90; Bottom Overlay "DCLK" at -6.695,47.244 h0.8 r90; Bottom Overlay "GND" at -9.235,47.244 h0.8 r90; Bottom Overlay "3.3" at -1.488,47.244 h0.8 r90; Bottom Overlay "DIO" at -4.282,47.244 h0.8 r90; Bottom Overlay "3.3" at 4.59,46.863 h0.8 r90; Bottom Overlay "G" at 4.59,44.958 h0.8 r90; Bottom Overlay "5V" at 4.59,42.164 h0.8 r90; Bottom Overlay "B9" at 4.59,39.497 h0.8 r90; Bottom Overlay "B8" at 4.59,36.83 h0.8 r90; Bottom Overlay "B7" at 4.59,34.544 h0.8 r90; Bottom Overlay "B6" at 4.59,32.004 h0.8 r90; Bottom Overlay "B5" at 4.59,29.21 h0.8 r90; Bottom Overlay "B4" at 4.59,26.67 h0.8 r90; Bottom Overlay "B3" at 4.59,24.333 h0.8 r90; Bottom Overlay "A15" at 4.59,21.488 h0.8 r90; Bottom Overlay "A12" at 4.59,18.745 h0.8 r90; Bottom Overlay "A11" at 4.59,16.332 h0.8 r90; Bottom Overlay "A10" at 4.59,13.589 h0.8 r90; Bottom Overlay "A9" at 4.59,11.43 h0.8 r90; Bottom Overlay "A8" at 4.59,9.144 h0.8 r90; Bottom Overlay "B15" at 4.59,6.35 h0.8 r90; Bottom Overlay "B14" at 4.59,3.556 h0.8 r90; Bottom Overlay "B10" at -15.527,11.176 h0.8 r90; Bottom Overlay "B1" at -15.527,14.097 h0.8 r90; Bottom Overlay "B0" at -15.527,16.51 h0.8 r90; Bottom Overlay "A0" at -15.527,36.703 h0.8 r90; Bottom Overlay "A1" at -15.527,34.442 h0.8 r90; Bottom Overlay "A2" at -15.527,31.732 h0.8 r90; Bottom Overlay "B11" at -15.527,8.661 h0.8 r90; Bottom Overlay "R" at -15.527,6.985 h0.8 r90; Bottom Overlay "A3" at -15.527,29.246 h0.8 r90; Bottom Overlay "A4" at -15.527,26.721 h0.8 r90; Bottom Overlay "A6" at -15.527,21.666 h0.8 r90; Bottom Overlay "A5" at -15.527,24.232 h0.8 r90; Bottom Overlay "G" at -15.527,1.803 h0.8 r90; Bottom Overlay "VB" at -15.527,47.396 h0.8 r90; Bottom Overlay "3.3" at -15.527,3.556 h0.8 r90; Bottom Overlay "A7" at -15.527,19.126 h0.8 r90; Bottom Overlay "B12" at 4.59,-2.032 h0.8 r90; Bottom Overlay "B13" at 4.59,0.762 h0.8 r90